# Altium PCB ST25RU3993_RF_MODULE_STENCIL.PcbDoc (part 2 of 2)
Units mil, origin at the board's own origin, x right, y up, seen from the top; angles counter-clockwise.
Board outline 3350 x 3250 mil, 2 copper layers (Top Layer, Bottom Layer), stack 50.4 mil thick; 34 components, 107 nets, 218 pads, 38 vias.
Unrouted connection lines stored in the file: 49.
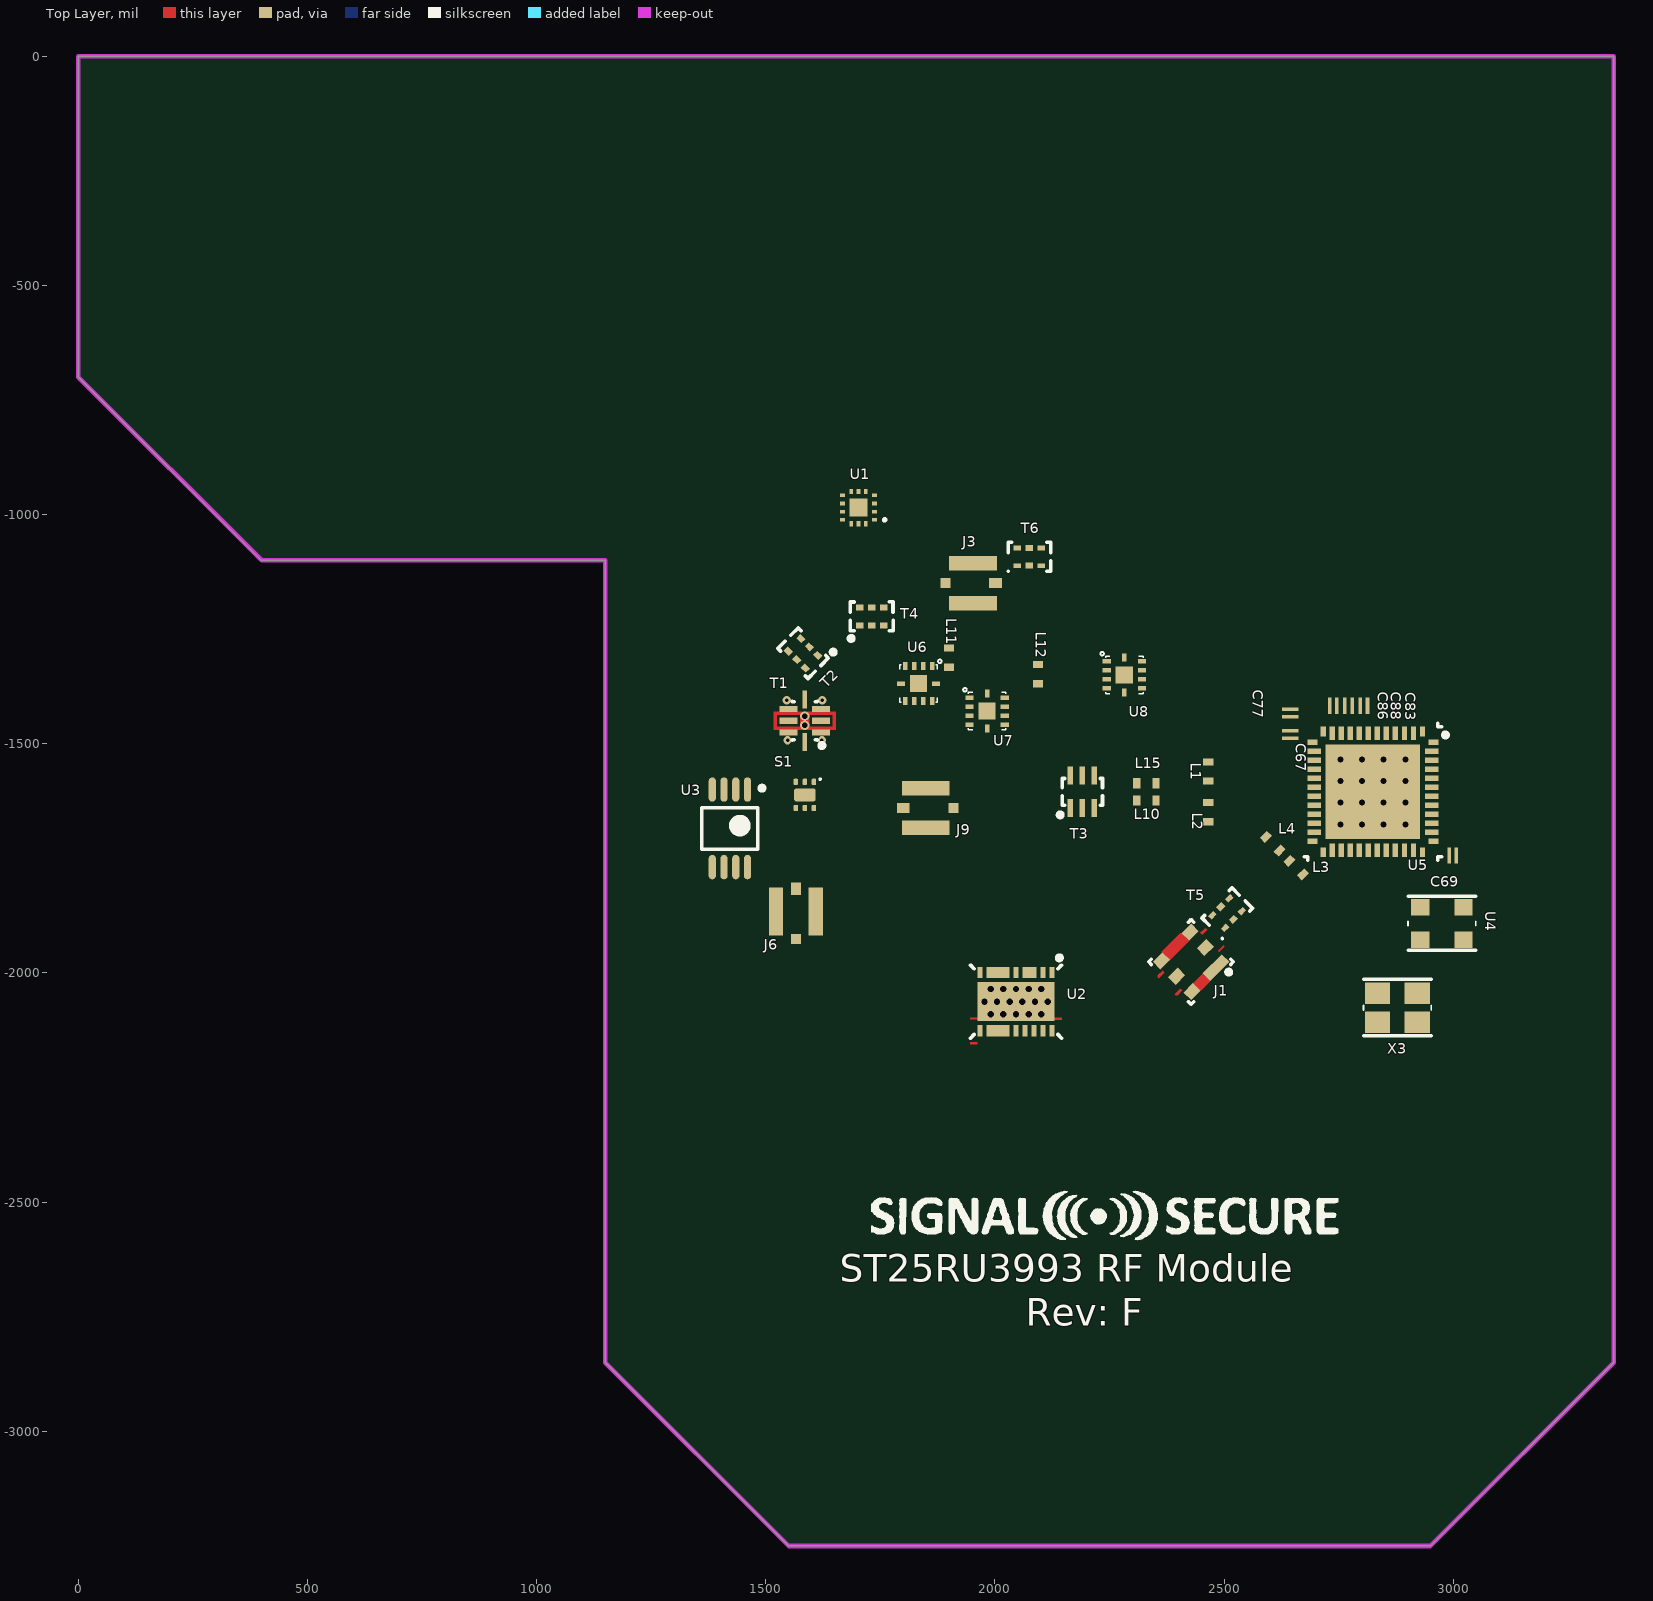
[diagram p0: Top Layer view]

## Silkscreen, mask and mechanical layers (free items; w line width, h text height) (continued)
Drill Drawing: (continued)
  text "13.78mil (0.350mm)" at 5226.44,-3370.5 h60
  text "PTH" at 6316.12,-3370.5 h60
  text "Via" at 6822,-3370.5 h60
  text "38 Total" at 4686.58,-3520.5 h60
Bottom Assembly:
  lines w5: -3993,-6786 -993,-6786 ; -3993,-6486 -993,-6486 ; -3093,-7086 -3093,-6486 ; -993,-7086 -993,-6486 ; -993,-6861 732,-6861 ; -993,-6636 732,-6636 ; -993,-6386 732,-6386 ; -993,-6111 732,-6111 ; -958,-7386 -958,-7086 ; -958,7314 -958,7614 ; 507,-7086 1907,-7086 ; 2377,-7386 2377,-7086 ; 2377,7314 2377,7614 ; 5707,7314 5707,7614 ; 9042,-7386 9042,-7086 ; 9042,7314 9042,7614 ; 12372,-7386 12372,-7086 ; 12372,7314 12372,7614 ; -3993,-7086 -3993,-5886 -993,-5886 ; -3993,-7086 -3993,7314 15407,7314 15407,-7086 -3993,-7086 ; -3993,-7086 732,-7086 732,-5886 -993,-5886 ; -993,-6486 -993,-5886 ; -4293,-7386 -4293,7614 15707,7614 15707,-7386 -4293,-7386
  text "2" at 10733.5,7401.5 h125
  text "5" at 733.5,7398.5 h125
  text "4" at 4065,7398.5 h125
  text "3" at 7400,7398.5 h125
  text "1" at 14055.66,7395 h125
  text "6" at -2591.5,7388.5 h125
  text "D" at -4092.5,-5599 h125
  text "D" at 15597.5,-5599 h125
  text "DATE:" at -256.5,-5977.5 h75
  text "ENGINEER:" at 703,-5977.5 h75
  text "TITLE:" at -1050.5,-6067.5 h125
  text "SEE SHEET 1" at -1548.88,-6075 h125
  text "SEE SHEET 1" at 705.5,-6081.5 h75
  text "SEE SHEET 1" at -318.31,-6083.68 h75
  text "DATE:" at -256.5,-6202.5 h75
  text "PCB DESIGNER:" at 703,-6202.5 h75
  text "SEE SHEET 1" at 710.5,-6331.5 h75
  text "SEE SHEET 1" at -308.31,-6332.68 h75
  text ".Plot_File_Name" at -1093,-6436 h125
  text "ISSUED BY:" at 704.5,-6487 h75
  text "DATE:" at -257,-6489.5 h75
  text "SEE SHEET 1" at 695.5,-6596.5 h75
  text "SEE SHEET 1" at -297.31,-6604.68 h75
  text "REV:" at -3134,-6619 h100
  text "Drawing Size: C" at -1379,-6694.5 h125
  text "FILE NAME:" at 702.5,-6731 h70
  text "SEE SHEET 1" at -3158.5,-6741.5 h80
  text "SEE SHEET 1" at 709,-6837.5 h70
  text "PRINTED:" at 706,-6952.5 h70
  text "SCALE: N/A" at -3136,-6984 h100
  text "SEE SHEET 1" at -1223.5,-6999.5 h125
  text ".PRINT_DATE" at 708.5,-7059 h70
  text "(ASSY) SHEET 2 OF 2" at -2747,-7232 h90
  text "6" at -2595,-7271 h125
  text "5" at 740,-7271 h125
  text "2" at 10730,-7271 h125
  text "1" at 14055.66,-7271 h125